# Altium PCB Плата энкодера.PcbDoc
Units mm, origin at the board's own origin, x right, y up, seen from the top; angles counter-clockwise.
Board outline 17.6 x 14.6 mm, 2 copper layers (Top Layer, Bottom Layer); 6 components, 4 nets, 18 pads, 0 vias.
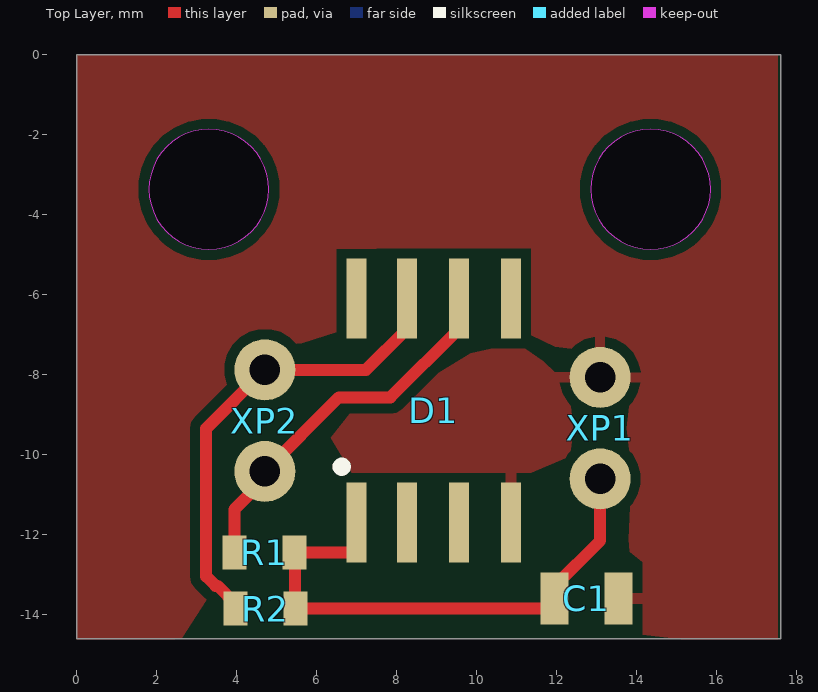
[diagram p0: Top Layer view]
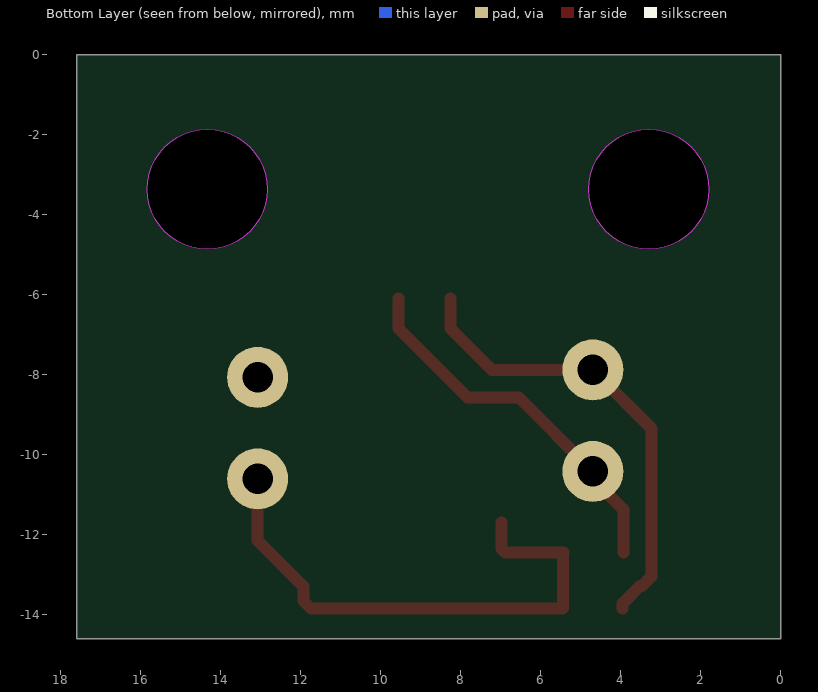
[diagram p1: Bottom Layer view, seen from below]
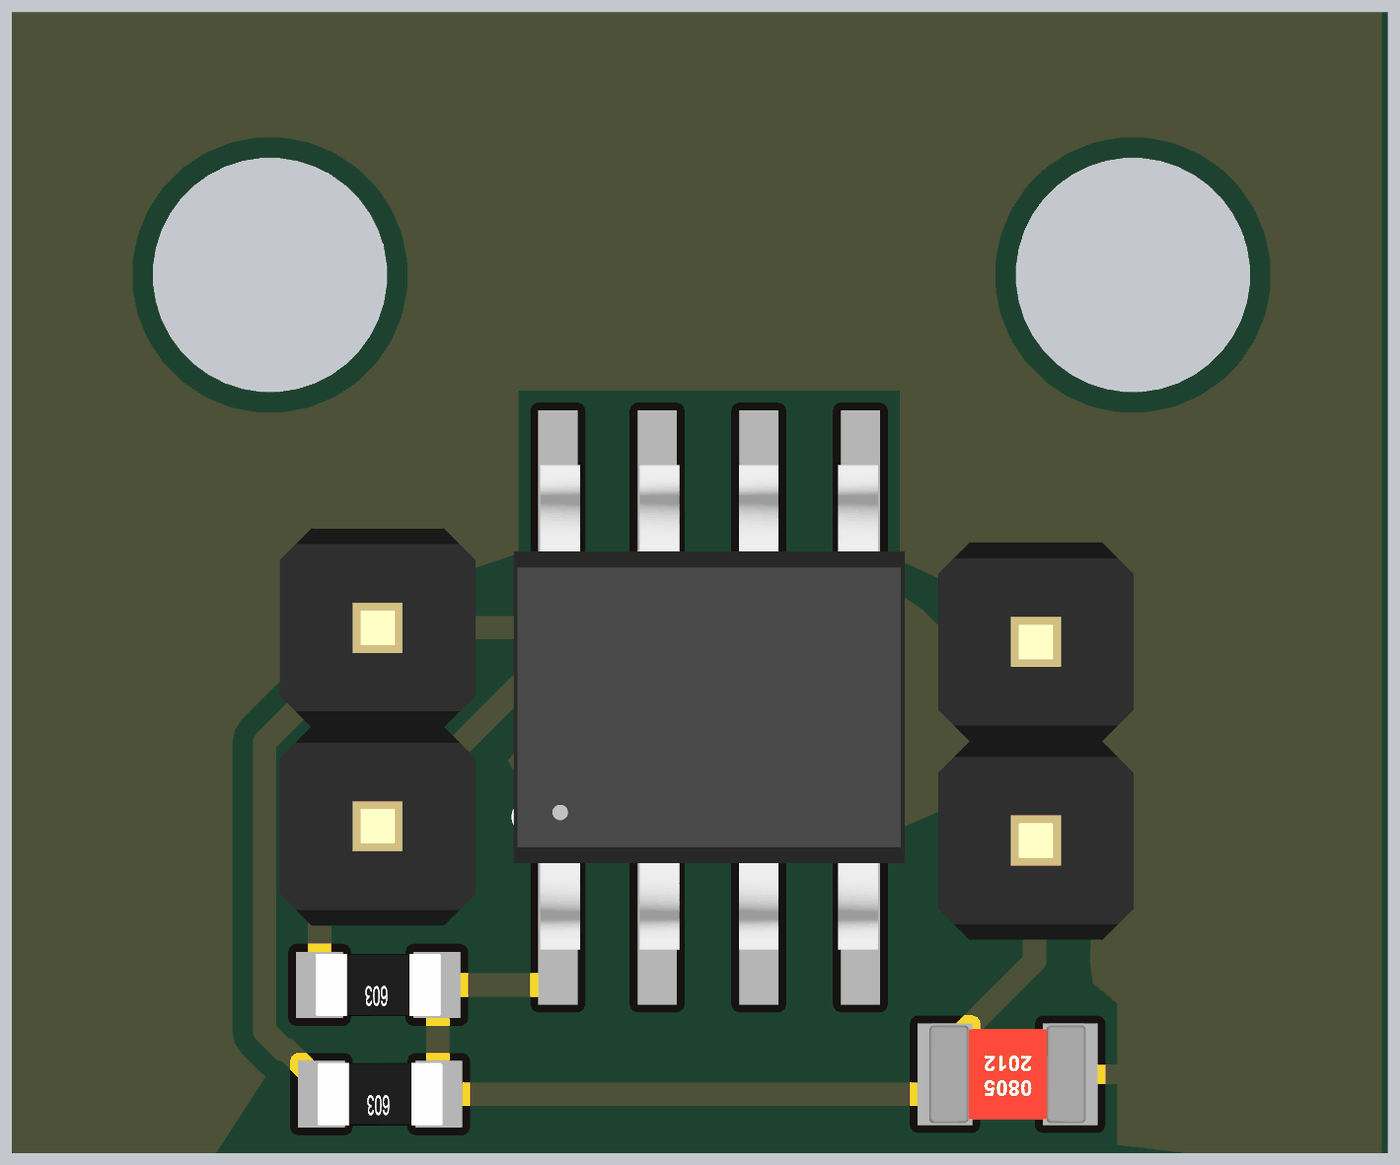
[diagram p2: 3D render of the assembled board from above, using the file's embedded part models]

## Layer stack, top to bottom
Top Solder: solder mask 0.0102, Solder Resist, Dk 3.5
Top Layer: signal copper 0.0356
Dielectric 1: dielectric 0.32, FR-4, Dk 4.8
Bottom Layer: signal copper 0.0356
Bottom Solder: solder mask 0.0102, Solder Resist, Dk 3.5

## Board outline
0,-14.6 0,0 17.6,0 17.6,-14.6
cut-out: 12.842,-3.362 ccw(c14.342,-3.362) 14.342,-4.862 ccw(c14.342,-3.362) 15.842,-3.362 ccw(c14.342,-3.362) 14.342,-1.862 ccw(c14.342,-3.362)
cut-out: 1.802,-3.362 ccw(c3.302,-3.362) 3.302,-4.862 ccw(c3.302,-3.362) 4.802,-3.362 ccw(c3.302,-3.362) 3.302,-1.862 ccw(c3.302,-3.362)

## Design rules (kind name [scope] priority, off if disabled: settings)
Clearance [All] p1: gap=0.254 ignorepadtopadclearanceinfootprint=FALSE
PolygonConnect [All] p1: connectstyle=Relief reliefconductorwidth=0.254 reliefentries=4 polygonreliefangle="90 Angle" airgapwidth=0.254
RoutingVias [All] p1: holewidth=0.711 width=1.27 viastyle="Through Hole" minholewidth=0.711 minwidth=1.27 maxholewidth=0.711 maxwidth=1.27
SolderMaskExpansion [All] p1: expansion=0.102 istentingtop=FALSE
Width [All] p1: maxlimit=1 minlimit=0.3 preferedwidth=0.254
30 further rules are at their usual default settings.

## Components (designator, comment, footprint, x,y, rotation, side; value= is the part's Value field where it differs from the comment)
C1 "Конденсатор" "0805 cap" 13.538,-13.589 r180 top
D1 "MT6701CT-STD" SOP8 6.985,-11.696 r0 top
R1 "Резистор" "0603 res" 5.437,-12.446 r180 top
R2 "Резистор" "0603 res" 5.461,-13.843 r180 top
XP1 "2x1 папа" "Питание разъём" 13.081,-8.061 r180 top
XP2 "2x1 папа" "Питание разъём" 4.699,-10.414 r0 top

## Footprints (in the part's own frame and the unit in brackets; to place one, negate y for a bottom-side part, rotate by r counter-clockwise, add the part's x,y. Pads: shape width x height; smd on the part's side, far side on the other; paste and mask are expansions set on the pad)
"0603 res" [mm]
  rect 0.6x0.85 smd: 0(0,0) 1(1.5,0)
  body extent -0.05,-0.4 1.55,0.4, height 0.3
"0805 cap" [mm]
  rect 0.7x1.3 smd: 0(0,0) 1(1.6,0)
  body extent -0.2,-0.63 1.8,0.63, height 0.9
SOP8 [mm]
  rect 0.5x2 smd: 1(0,0) 2(1.27,0) 3(2.57,0) 4(3.87,0) 5(3.87,5.6) 6(2.57,5.6) 7(1.27,5.6) 8(0,5.6)
  silkscreen extent -0.46,1.3 -0.27,1.5, body extent -0.57,-0.3 4.44,5.9, height 1.7
"Питание разъём" [mil]
  round 60 hole 30: 1(0,100) 2(0,0)
  body extent -50,-50 48,150, height 415

## Part data
D1: "Инкрементарный энкодер"

## Nets (pads, with @x,y where several pads share a name; then routed paths per layer and width w, separated by ;. In a path a pad name is that pad's centre, name@x,y a point inside that pad or via, vN(x,y) a via of type N, cw(c..) or ccw(c..) an arc to the next point about the centre after c; other vN are vias at no path point)
NetC1_0: C1.0 D1.4 XP1.2
NetC1_1: C1.1 D1.1 R1.0 R2.0 XP1.1 | length 13.7
  Top Layer w0.3: D1.1 6.985,-12.346 6.885,-12.446 R1.0 5.449,-12.458 5.449,-13.831 R2.0 11.738,-13.843 11.938,-13.643 C1.1 11.938,-13.289 13.081,-12.146 XP1.1
NetD1_6: D1.6 R1.1 XP2.2 | length 9.4
  Top Layer w0.3: R1.1 3.937,-11.366 4.699,-10.604 XP2.2 6.55,-8.563 7.838,-8.563 9.555,-6.846 D1.6
NetD1_7: D1.7 R2.1 XP2.1 | length 11.6
  Top Layer w0.3: R2.1 3.961,-13.718 3.518,-13.275 3.47,-13.275 3.233,-13.038 3.233,-9.34 XP2.1 7.227,-7.874 8.255,-6.846 D1.7
pads on no net: D1.2 D1.3 D1.5 D1.8

## Polygon pours and split planes (outlines as drawn)
NetC1_0 on Top Layer "NETC1_0_L01_P000" (solid, remove dead copper, pour order 0): 0,0 17.526,0 17.526,-14.605 0,-14.605

## Silkscreen, mask and mechanical layers (free items; w line width, h text height)
Mechanical 1:
  circle w0.254: c3.302,-3.362 r1.5
  circle w0.254: c14.342,-3.362 r1.5
  lines w0.254: 0,-14.6 17.6,-14.6 17.6,0 0,0 0,-14.6